# EAGLE board alvin_skripsi v1 (EAGLE 9.7.0)
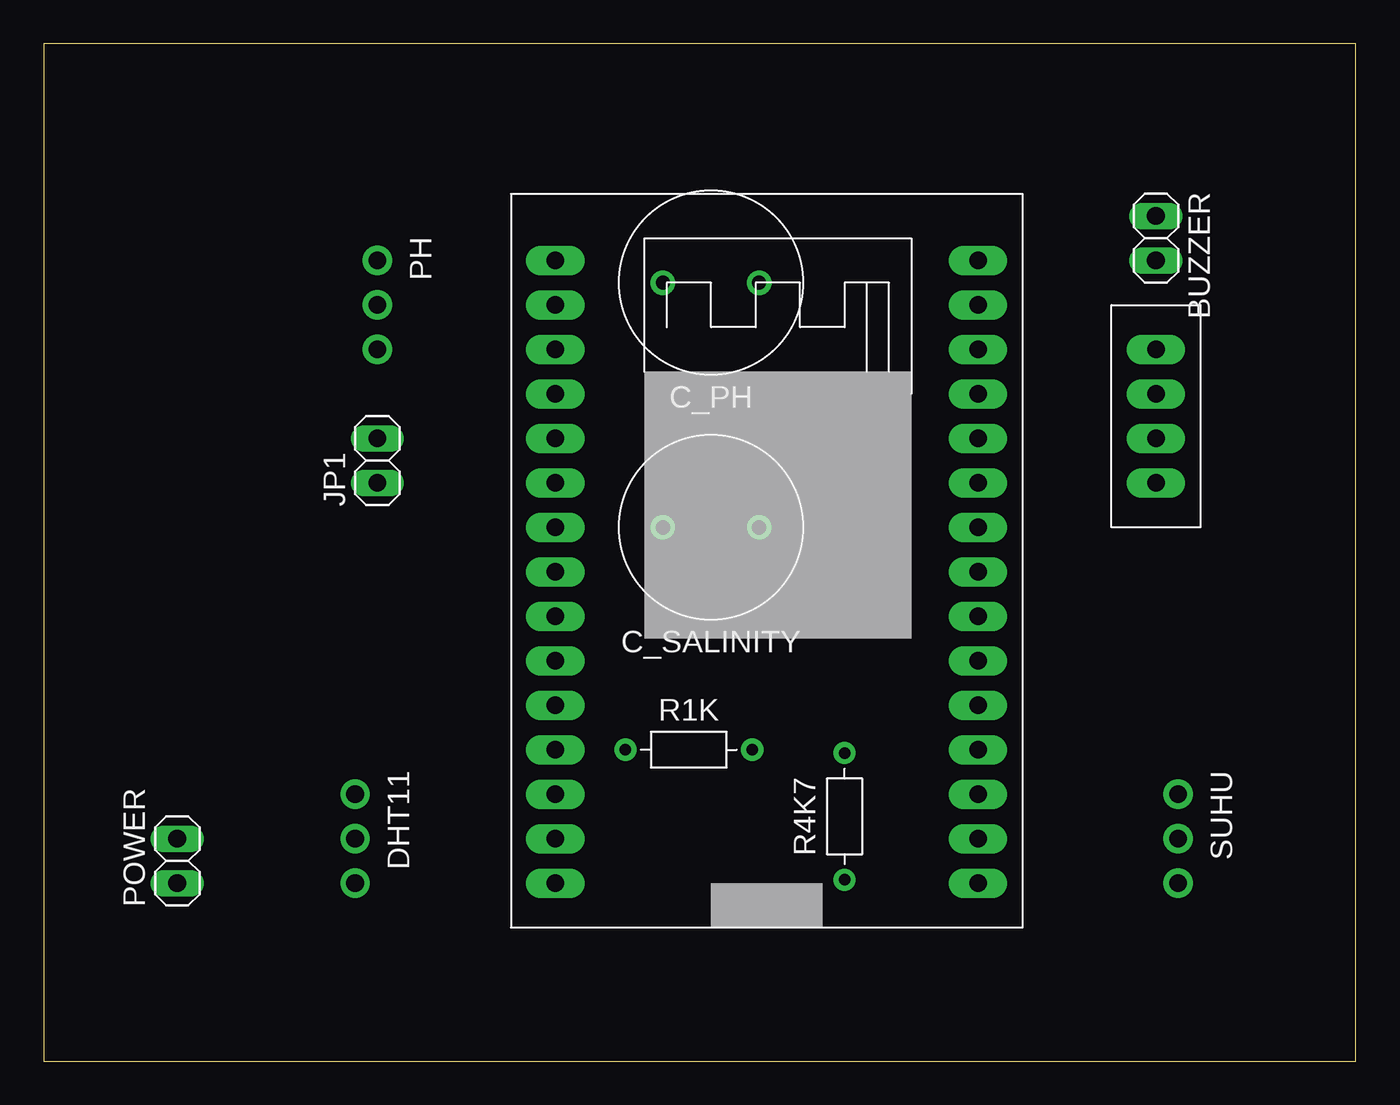
[diagram p0: board, top side]
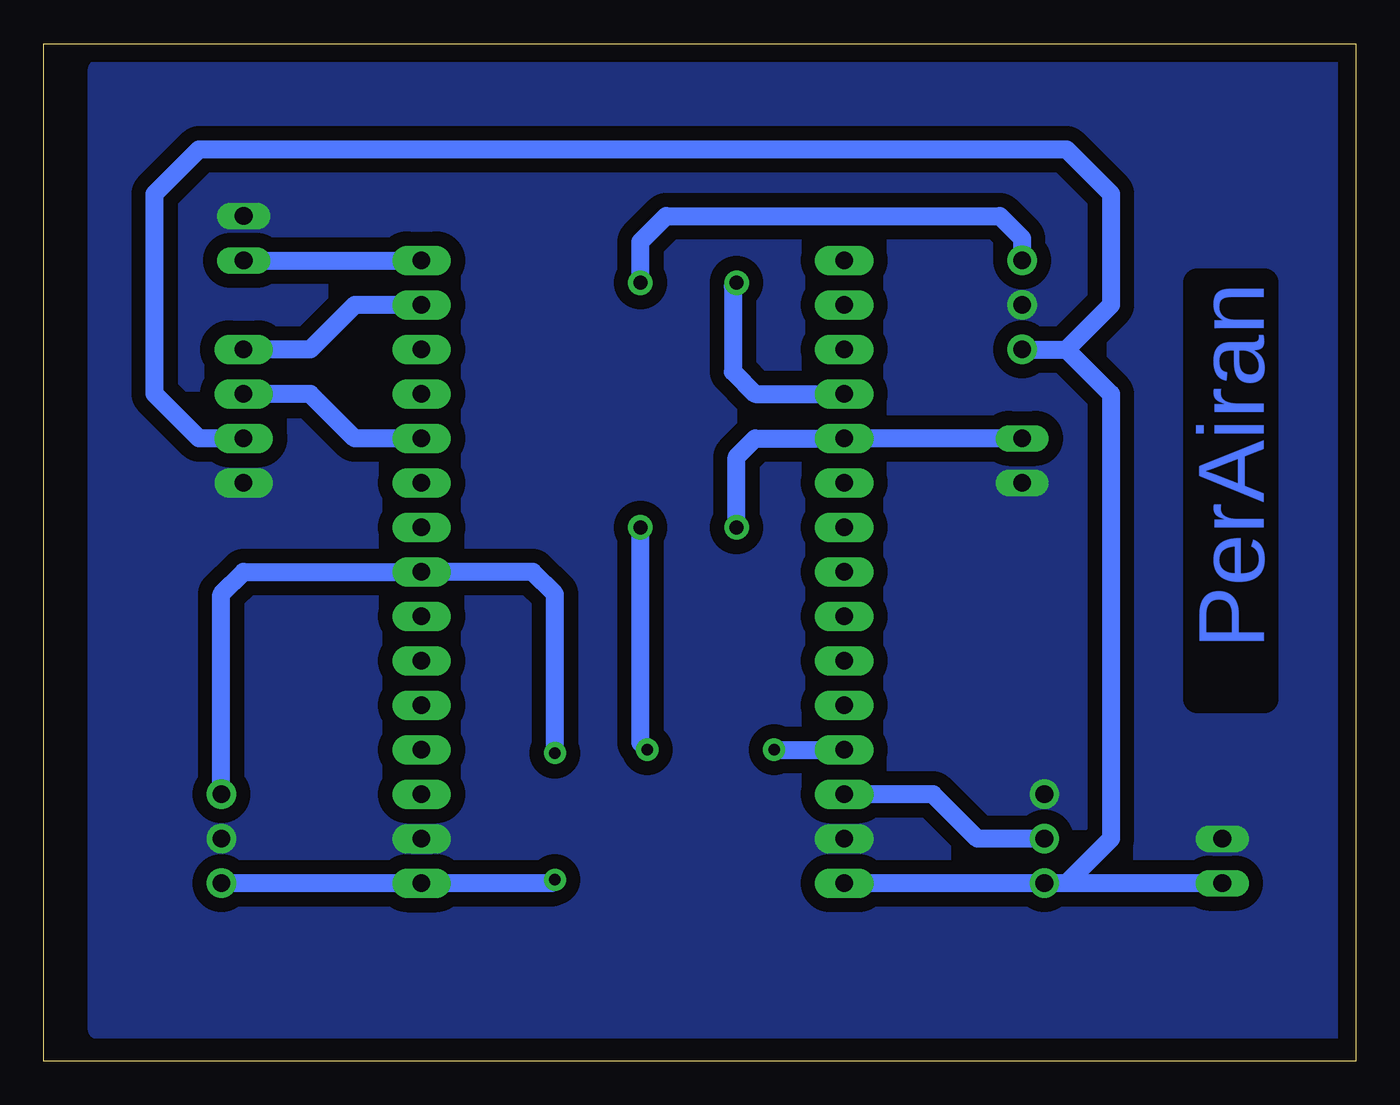
[diagram p1: board, bottom side, seen from below]

Size 74.91 x 58.09 mm. Coordinates in mm from the lower left corner, seen from the top.
Outline: 0,0 74.91,0 74.91,58.09 0,58.09 0,0
Copper layers (1*16): Top 0.035mm / dielectric 1.5mm / Bottom 0.035mm
Design rules "default": minimum track width 6mil, minimum drill 0.35mm, track to track 6mil, track to pad 6mil, pad to pad 6mil, via to via 6mil, smd to smd 6mil, copper to edge 40mil, drill to drill 6mil, minimum pad ring 10mil, minimum via ring 8mil, stop-mask expansion 4mil, vias tented up to drill 0mil, thermal gap 10mil

## Footprints (pad centres in the part's own frame; a part is rotated, then mirrored left to right if it is on the bottom)
1X02 = drill 1.016 long: 1 -1.27,0; 2 1.27,0
CAPRD550W60D1025H1250B = drill 0.8 pad 1.4: 1 -2.75,0; 2 2.75,0
1X03-CLEANBIG = drill 1.016 pad 1.676: 1 -2.54,0; 2 0,0; 3 2.54,0
RESAD724W46L381D178B = drill 0.66 pad 1.26: 1 -3.62,0; 2 3.62,0
ESP32_30PIN = drill 1 pad 1.676 long: 3V3 26.67,2.54; 5V 2.54,2.54; D2 26.67,10.16; D4 26.67,12.7; D5 26.67,20.32; D12 2.54,10.16; D13 2.54,7.62; D14 2.54,12.7; D15 26.67,7.62; D18 26.67,22.86; D19 26.67,25.4; D21 26.67,27.94; D22 26.67,35.56; D23 26.67,38.1; D25 2.54,20.32; D26 2.54,17.78; D27 2.54,15.24; D32 2.54,25.4; D33 2.54,22.86; D34 2.54,30.48; D35 2.54,27.94; EN 2.54,38.1; GND 2.54,5.08; GND1 26.67,5.08; RX 26.67,30.48; RX2 26.67,15.24; TX 26.67,33.02; TX2 26.67,17.78; VN 2.54,33.02; VP 2.54,35.56
LCD_I2C = drill 1 pad 1.676 long: GND -2.54,10.16; SCL -2.54,2.54; SDA -2.54,5.08; VCC -2.54,7.62

## Placement (x,y rotation side)
BUZZER  PINHD-1X2  [1X02]  63.5,46.99 270 top
C_PH  [CAPRD550W60D1025H1250B]  38.1,44.45 180 top
C_SALINITY  [CAPRD550W60D1025H1250B]  38.1,30.48 180 top
DHT11  [1X03-CLEANBIG]  17.78,12.7 270 top
JP1  PINHD-1X2  [1X02]  19.05,34.29 90 top
PH  [1X03-CLEANBIG]  19.05,43.18 270 top
POWER  PINHD-1X2  [1X02]  7.62,11.43 90 top
R1K  [RESAD724W46L381D178B]  36.83,17.78 0 top
R4K7  [RESAD724W46L381D178B]  45.72,13.97 90 top
SUHU  [1X03-CLEANBIG]  64.77,12.7 270 top
U$1  ESP32_30PIN  [ESP32_30PIN]  26.67,7.62 0 top
U$2  LCD_I2C  [LCD_I2C]  60.96,43.18 180 top

## Library data of the parts
BUZZER JP1 POWER = Connector; CATEGORY: CONNECTOR; SUB-CATEGORY: PIN-HEADER
C_PH C_SALINITY = Capacitor; CATEGORY: Capacitor
DHT11 PH SUHU = adafruit
R1K R4K7 = Resistor; CATEGORY: Resistor; SUB-CATEGORY: Fixed
U$1 = FusionLocal
U$2 = LocalLib

## Nets
3V3: R4K7.1 SUHU.3 U$1.3V3
5V: DHT11.3 PH.3 POWER.1 U$1.5V U$2.VCC
DATA: DHT11.2 U$1.D13
GND: BUZZER.1 DHT11.1 JP1.1 PH.2 POWER.2 SUHU.2 U$1.GND U$1.GND1 U$2.GND
IN_PH: C_PH.2 U$1.D34
N$1: R1K.1 U$1.D12
N$2: C_SALINITY.1 R1K.2
N$3: C_SALINITY.2 JP1.2 U$1.D35
N$4: BUZZER.2 U$1.D23
OUT_SUHU: R4K7.2 SUHU.1 U$1.D5
PH_OUT: C_PH.1 PH.1
SCL: U$1.D22 U$2.SCL
SDA: U$1.D21 U$2.SDA

## Tracks (layer width: path | path; a pad name or v marks a point on that pad's centre or on a via)
3V3
  Bottom 1.016: R4K7.1 45.91,10.16 U$1.3V3 SUHU.3
5V
  Bottom 1.016: DHT11.3 U$1.5V | POWER.1 DHT11.3 | U$2.VCC 66.04,35.56 68.58,38.1 68.58,49.53 66.04,52.07 16.51,52.07 13.97,49.53 13.97,43.18 16.51,40.64 | PH.3 16.51,40.64 | 16.51,40.64 13.97,38.1 13.97,12.7 16.51,10.16 DHT11.3
DATA
  Bottom 1.016: DHT11.2 21.59,12.7 24.13,15.24 U$1.D13
GND
  pour Bottom (isolate 0.813, no thermals): 0.51,1.78 71.88,1.78 71.88,56.64 0.51,56.64
IN_PH
  Bottom 1.016: C_PH.2 35.56,44.24 35.56,39.37 34.29,38.1 U$1.D34
N$1
  Bottom 1.016: R1K.1 U$1.D12
N$2
  Bottom 1.016: R1K.2 40.85,18.18 C_SALINITY.1
N$3
  Bottom 1.016: JP1.2 U$1.D35 34.29,35.56 35.35,34.5 C_SALINITY.2
N$4
  Bottom 1.016: BUZZER.2 U$1.D23
OUT_SUHU
  Bottom 1.016: R4K7.2 45.72,26.67 46.99,27.94 U$1.D5 63.5,27.94 64.77,26.67 SUHU.1
PH_OUT
  Bottom 1.016: C_PH.1 40.85,46.78 39.37,48.26 20.32,48.26 19.05,46.99 PH.1
SCL
  Bottom 1.016: U$1.D22 57.15,43.18 59.69,40.64 U$2.SCL
SDA
  Bottom 1.016: U$1.D21 57.15,35.56 59.69,38.1 U$2.SDA

## Text on the board
Bottom: PerAiran